# Altium PCB FPC-v3.2.PcbDoc
Units mil, origin at the board's own origin, x right, y up, seen from the top; angles counter-clockwise.
Board outline 1168.4 x 4138.89 mil, 2 copper layers (Top Layer, Bottom Layer); 1 components, 6 nets, 16 pads, 3 vias.
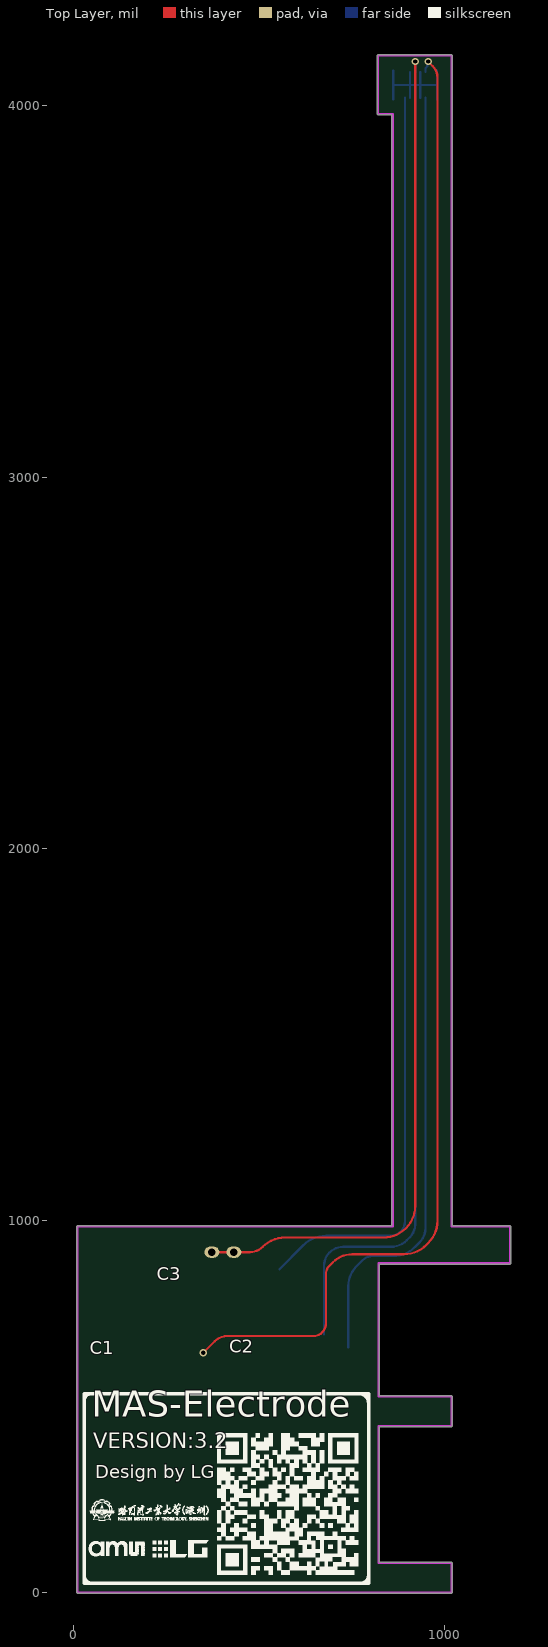
[diagram p0: Top Layer view]
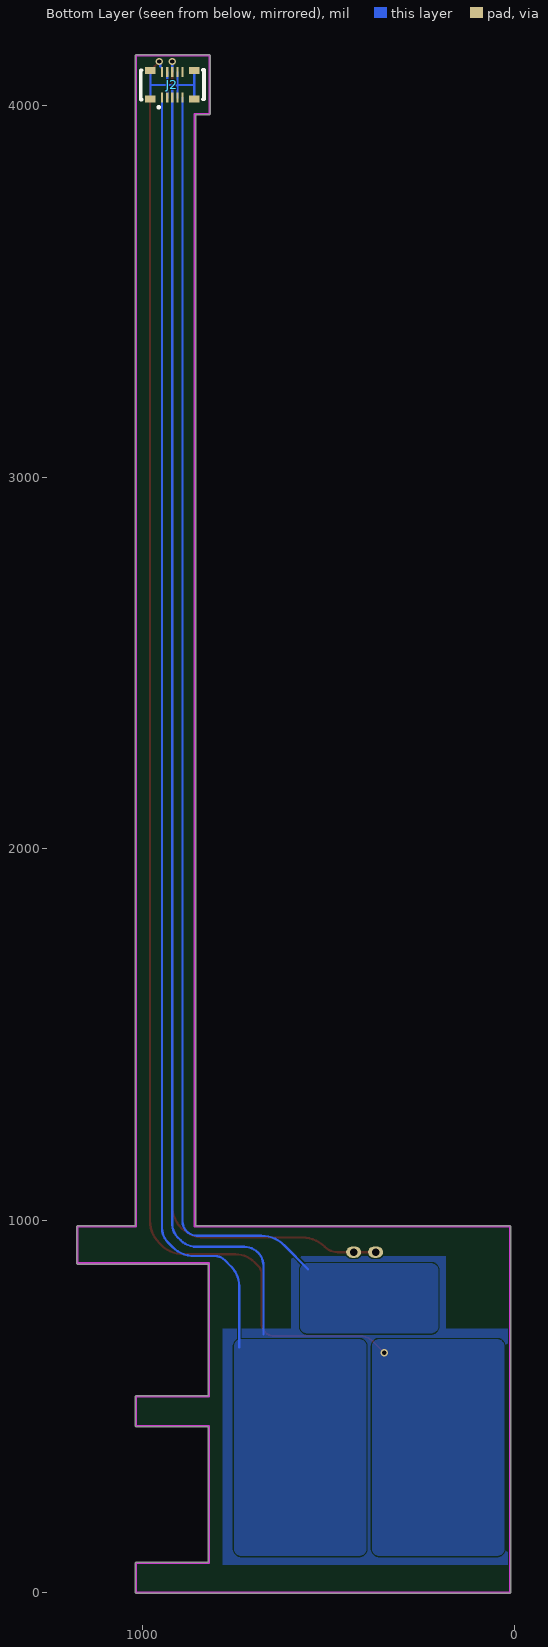
[diagram p1: Bottom Layer view, seen from below]

## Layer stack, top to bottom
Top Solder: solder mask 0.4, Solder Resist, Dk 3.5
Top Layer: signal copper 1.4
Dielectric 1: dielectric 12.6, FR-4, Dk 4.8
Bottom Layer: signal copper 1.4
Bottom Solder: solder mask 0.4, Solder Resist, Dk 3.5

## Board outline
823.37,81.51 823.37,446.13 1017.7,446.13 1020.22,448.65 1020.22,527.39 1017.7,529.9 823.37,529.9 823.37,883.56 1175.18,883.56 1177.7,886.08 1177.7,984.5 1175.18,987.02 1020.22,987.02 1020.22,4134.11 1017.7,4136.62 820.85,4136.62 818.34,4134.11 818.34,3976.63 820.85,3974.11 857.71,3974.11 857.71,987.02 11.81,987.02 9.3,984.5 9.3,0.25 11.81,-2.27 1017.7,-2.27 1020.22,0.25 1020.22,78.99 1017.7,81.51

## Design rules (kind name [scope] priority, off if disabled: settings)
Clearance [All] p1: gap=4 ignorepadtopadclearanceinfootprint=FALSE
PolygonConnect [All] p1: connectstyle=Relief reliefconductorwidth=10 reliefentries=4 polygonreliefangle="90 Angle" airgapwidth=10
RoutingVias [All] p1: holewidth=19.68 width=11.81 viastyle="Through Hole" minholewidth=19.68 minwidth=11.81 maxholewidth=19.68 maxwidth=11.81
SolderMaskExpansion [All] p1: expansion=4 istentingtop=FALSE
Width [All] p1: maxlimit=20 minlimit=4 preferedwidth=5
30 further rules are at their usual default settings.

## Components (designator, comment, footprint, x,y, rotation, side; value= is the part's Value field where it differs from the comment)
J2 "BM24-10DP/2-0.35V(51)" CONN-SMD_BM24-10DP-2-0.35V-51 920,4055 r180 bottom

## Footprints (in the part's own frame and the unit in brackets; to place one, negate y for a bottom-side part, rotate by r counter-clockwise, add the part's x,y. Pads: shape width x height; smd on the part's side, far side on the other; paste and mask are expansions set on the pad)
CONN-SMD_BM24-10DP-2-0.35V-51 [mm] "板对板连接器"
  rect 0.15x0.69 smd: 1(-0.7,-0.875) 2(-0.35,-0.875) 3(0,-0.875) 4(0.35,-0.875) 5(0.7,-0.875) 6(0.7,0.875) 7(0.35,0.875) 8(0,0.875) 9(-0.35,0.875) 10(-0.7,0.875)
  rect 0.73x0.49 smd: 11(1.5,0.975) 12(1.5,-0.975) 13(-1.5,-0.975) 14(-1.5,0.975)
  silkscreen extent -2.16,-1.55 2.16,1.02, body extent -2.17,-1 2.15,1.02, height 0.64

## Part data
J2: "板对板连接器", Current Rating (Max)=5A, JLCPCB Part Class="Extended Part", LCSC Part Name=BTB板对板,BM24系列,0.35间距,10PIN公座, Manufacturer=HRS(广濑), Operating Temperature Range=-40℃~+85℃, Add into BOM=yes, Convert to PCB=yes, Device=BM24-10DP/2-0.35V(51), Gender=公, Manufacturer Part=BM24-10DP/2-0.35V(51), Mounting Style=立贴, Name=BM24-10DP/2-0.35V(51), Number of Pins=10, Number of Rows=2, Pitch=0.35mm, Supplier=LCSC, Supplier Footprint=SMD,P=0.35mm, Supplier Part=C424554, Symbol=BM24-10DP/2-0.35V(51)

## Free pads (board coordinates)
  oval 40x30 hole 20: 8(373.4,915.6) 8(432.46,915.6)

## Via types
v1: diameter 19.68, hole 11.81, Top Layer to Bottom Layer, tented both sides, 3 vias

## Nets (pads, with @x,y where several pads share a name; then routed paths per layer and width w, separated by ;. In a path a pad name is that pad's centre, name@x,y a point inside that pad or via, vN(x,y) a via of type N, cw(c..) or ccw(c..) an arc to the next point about the centre after c; other vN are vias at no path point)
C1: J2.10 | length 4032.2
  Top Layer w6: v1(350,645) 380.86,675.86 ; 380.88,675.88 cw(c415,641.72) 415,690 645.86,690 ccw(c645.86,724.14) 669.98,699.98 ccw(c645.86,724.14) 680,724.14 680,856.72 cw(c712.07,856.72) 689.39,879.39 698.79,888.79 cw(c750,837.57) 750,910 890,910 ccw(c890,994.5) 949.72,934.72 ; 949.75,934.75 955.25,940.25 ; v1(955,4117.77) 955,4117.41 967.5,4104.91 cw(c937.32,4074.73) 980,4074.73 980,1000 cw(c895.5,1000) 955.28,940.28
  Bottom Layer w6: J2.10 947.55,4099.99 952.38,4104.82 952.38,4115.15 v1(955,4117.77)
C2: J2.1 | length 3497.4
  Bottom Layer w6: 740,660 740,825 cw(c812.43,825) 761.21,876.21 779.39,894.39 cw(c805,868.79) 805,905 860,905 ccw(c860,989.5) 919.72,929.72 ; 919.75,929.75 931.68,941.68 ccw(c893.37,980) 947.56,980 J2.1
C3: J2.5 | length 3415.2
  Bottom Layer w6: 555,870 620,935 cw(c680.36,874.64) 620.04,935.04 cw(c680.36,874.64) 680.36,960 854.14,960 ccw(c854.14,998.3) 881.19,971.19 ; 881.24,971.24 ccw(c854.14,998.3) 892.44,998.3 J2.5
C4: J2.6
GND: J2.8 pad.8 | length 3711.6
  Top Layer w6: pad.8@373.4,915.6 432.46,915.6 475.25,915.6 ccw(c475.25,964.75) 510,930 cw(c570.36,869.64) 570.36,955 834.3,955 ccw(c834.3,1041.18) 895.24,980.24 ccw(c835.49,1040) 920,1040 v1(920,4117.77)
  Bottom Layer w6: J2.8 v1(920,4117.77)
GP: J2.2 J2.3 J2.4 J2.7 J2.9 J2.11 J2.12 J2.13 J2.14 | length 3967.1
  Bottom Layer w6: 675,695 675,878.79 cw(c726.21,878.79) 689.99,914.99 cw(c726.21,878.79) 726.21,930 855,930 ccw(c855,990.36) 897.68,947.68 905.85,955.85 ccw(c871.7,990) 920,990 J2.3 920,4055 ; J2.12 860.95,4055 ; J2.11 860.95,4055 ; J2.4 906.22,4055 ; J2.7 906.22,4056.22 ; J2.2 933.77,4053.78 935,4055 ; J2.9 933.77,4056.22 935,4055 ; J2.13 979.05,4055 ; J2.14 979.05,4055 ; 860.95,4055 905,4055 ; 905,4055 906.22,4055 ; 905,4055 906.22,4056.22 ; 906.22,4055 920,4055 ; 906.22,4055 906.22,4056.22 ; 920,4055 935,4055 ; 935,4055 979.05,4055

## Polygon pours and split planes (outlines as drawn)
GP on Bottom Layer "NONET_L01_P-001" (solid, pour order 3): 185,905 600,905 600,710 785,710 785,75 15,75 15,710 185,710
C2 on Bottom Layer "NONET_L01_P-001" (solid, pour order 2): 398.61,118.36 ccw(c418.3,118.36) 418.3,98.68 734.24,98.68 ccw(c734.24,118.36) 753.92,118.36 753.92,661.67 ccw(c734.24,661.67) 734.24,681.35 418.3,681.35 ccw(c418.3,661.67) 398.61,661.67
C1 on Bottom Layer "NONET_L01_P-001" (solid, pour order 1): 27.56,118.36 27.56,661.67 cw(c47.24,661.67) 47.24,681.35 363.18,681.35 cw(c363.18,661.67) 382.87,661.67 382.87,118.36 cw(c363.18,118.36) 363.18,98.68 47.24,98.68 cw(c47.24,118.36)
C3 on Bottom Layer "NONET_L01_P-001" (solid, pour order 0): 224.9,697.1 cw(c224.9,716.79) 205.21,716.79 205.21,866.39 cw(c224.9,866.39) 224.9,886.08 556.58,886.08 cw(c556.58,866.39) 576.27,866.39 576.27,716.79 cw(c556.58,716.79) 556.58,697.1

## Keep-outs
Keep-Out Layer:
  lines w5: 820.85,984.5 860.22,984.5 ; 860.22,984.5 11.81,984.5 11.81,0.25 820.85,0.25 1017.7,0.25 1017.7,78.99 820.85,78.99 820.85,448.65 1017.7,448.65 1017.7,527.39 820.85,527.39 820.85,886.08 1017.7,886.08 1175.18,886.08 1175.18,984.5 1017.7,984.5 1017.7,4134.11 820.85,4134.11 820.85,3976.63 860.22,3976.63 860.22,984.5

## Silkscreen, mask and mechanical layers (free items; w line width, h text height)
Top Overlay:
  drawing of 444 lines, arcs and shapes, not listed
  text "C3" at 225.3,828.51 h60
  text "C2" at 420.3,633.51 h60
  text "C1" at 45.3,628.51 h60
  text "MAS-Electrode" at 50,450 h120
  text "VERSION:3.2" at 53.95,374.5 h70
  text "Design by LG" at 60,295.03 h60
Mechanical 1:
  lines w0.5: 820.85,984.5 860.22,984.5 ; 860.22,984.5 860.22,3976.63 820.85,3976.63 820.85,4134.11 1017.7,4134.11 1017.7,984.5 1175.18,984.5 1175.18,886.08 1017.7,886.08 820.85,886.08 820.85,527.39 1017.7,527.39 1017.7,448.65 820.85,448.65 820.85,78.99 1017.7,78.99 1017.7,0.25 820.85,0.25 11.81,0.25 11.81,984.5 860.22,984.5
  lines w10: 820.85,3976.63 1017.7,3976.63 1017.7,4134.11 820.85,4134.11 820.85,3976.63
  text "1.框选区域顶层PI补强 / 2.客编放在底层" at 1049.75,4020 h60